# EAGLE board apc_v2 (EAGLE 5.07)
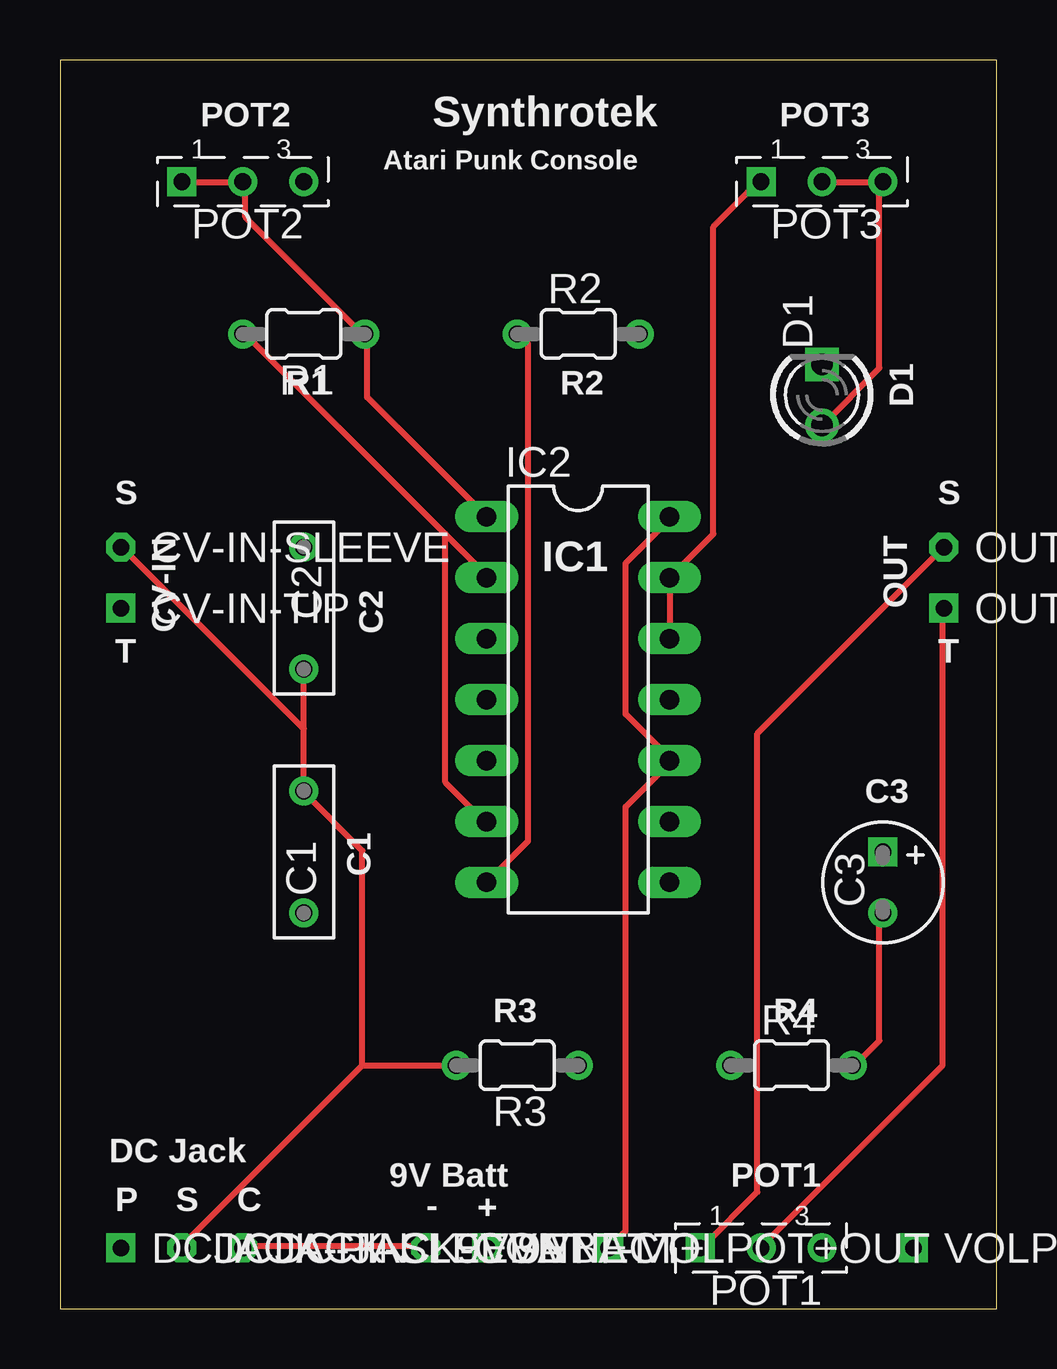
[diagram p0: board, top side]
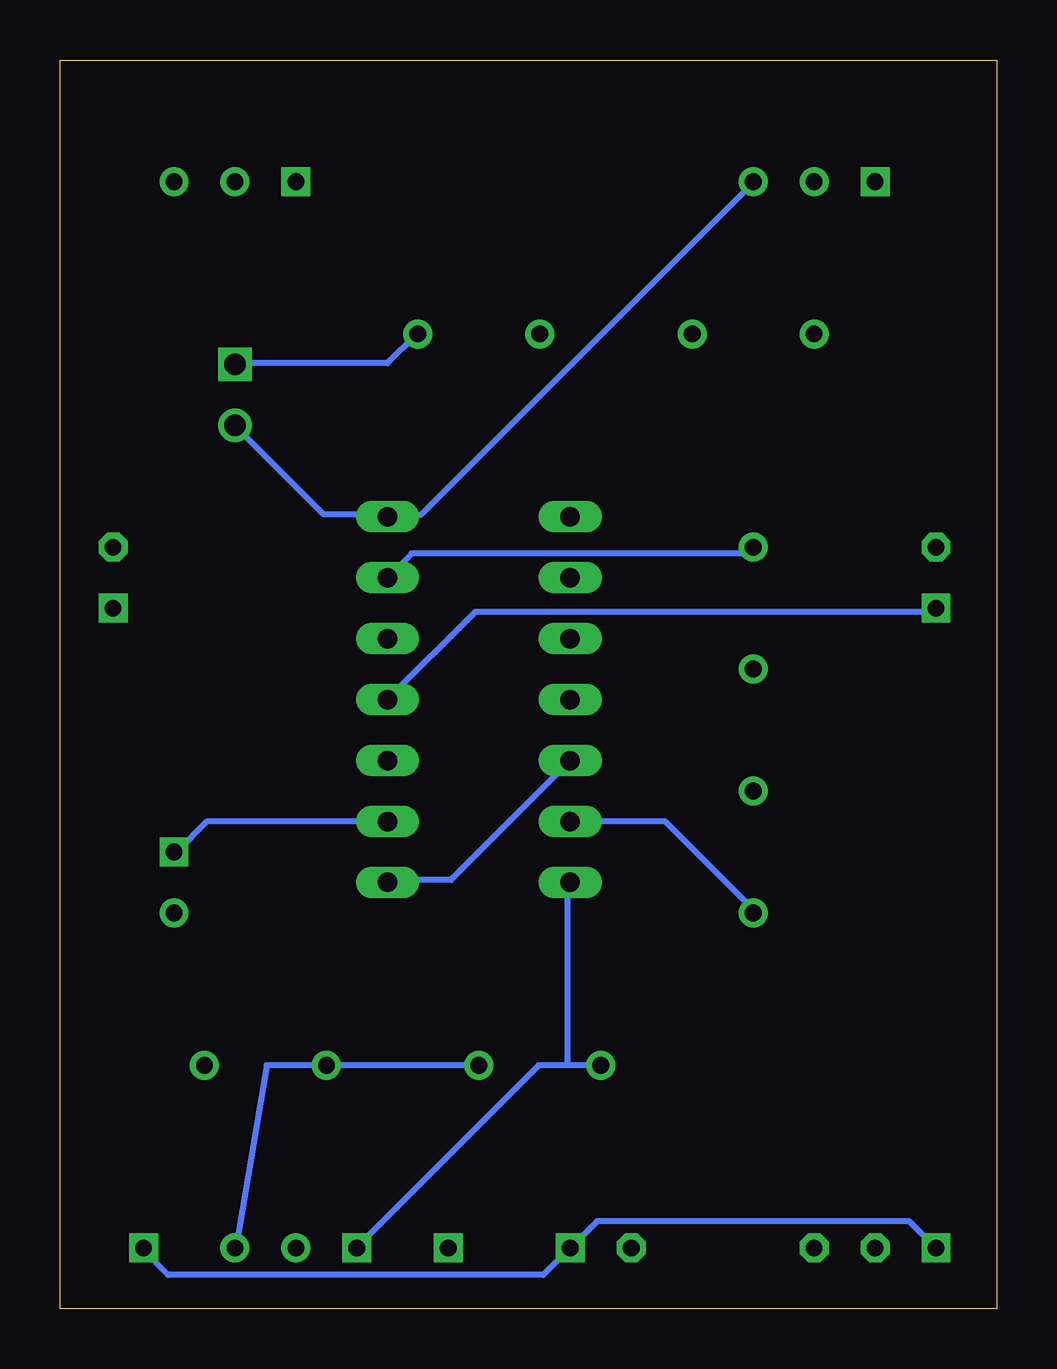
[diagram p1: board, bottom side, seen from below]

Size 39.04 x 52.06 mm. Coordinates in mm from the lower left corner, seen from the top.
Outline: 0,0 39.04,0 39.04,52.06 0,52.06 0,0
Copper layers (1*16): Top 0.035mm / dielectric 1.5mm / Bottom 0.035mm
Design rules "default": minimum track width 10mil, minimum drill 24mil, track to track 8mil, track to pad 8mil, pad to pad 8mil, via to via 8mil, smd to smd 8mil, copper to edge 40mil, drill to drill 8mil, minimum pad ring 10mil, minimum via ring 8mil, stop-mask expansion 4mil, vias tented up to drill 0mil, thermal gap 10mil

## Footprints (pad centres in the part's own frame; a part is rotated, then mirrored left to right if it is on the bottom)
SQUARE = drill 0.7 square: 1 0,0
OCTOGON = drill 0.7 octagon: 1 0,0
072X025 = drill 0.7 round: 1 -2.54,0; 2 2.54,0
050_020_1 = drill 0.7 square: + -1.27,0 | drill 0.7 round: - 1.27,0
LED3MM = drill 0.9 round: A -1.27,0 | drill 0.9 square: K 1.27,0
DIL14 = drill 0.813 long: 1 -7.62,-3.81; 2 -5.08,-3.81; 3 -2.54,-3.81; 4 0,-3.81; 5 2.54,-3.81; 6 5.08,-3.81; 7 7.62,-3.81; 8 7.62,3.81; 9 5.08,3.81; 10 2.54,3.81; 11 0,3.81; 12 -2.54,3.81; 13 -5.08,3.81; 14 -7.62,3.81
POT = drill 0.7 square: 1 2.54,0 | drill 0.7 round: 2 0,0; 3 -2.54,0
R0204/2 = drill 0.7 round: 1 -2.54,0; 2 2.54,0

## Placement (x,y rotation side)
9VBATT+  [SQUARE]  17.78,2.54 0 top
9VBATT-  [OCTOGON]  15.24,2.54 0 top
C1  0.01uF  [072X025]  10.16,19.05 90 top
C2  0.1uF  [072X025]  10.16,29.21 270 top
C3  10uF  [050_020_1]  34.29,17.78 270 top
CV-IN-SLEEVE  [OCTOGON]  2.54,31.75 0 top
CV-IN-TIP  [SQUARE]  2.54,29.21 0 top
D1  LED3MM  [LED3MM]  31.75,38.1 90 top
DC-JACK-CONNECT  [OCTOGON]  7.62,2.54 0 top
DCJACK-PIN  [SQUARE]  2.54,2.54 0 top
DCJACK-SLEEVE  [OCTOGON]  5.08,2.54 0 top
IC2  LM556N  [DIL14]  21.59,25.4 270 top
OUT-SLEEVE  [OCTOGON]  36.83,31.75 0 top
OUT-TIP  [SQUARE]  36.83,29.21 0 top
POT1  [POT]  29.21,2.54 180 top
POT2  500k  [POT]  7.62,46.99 180 top
POT3  500k  [POT]  31.75,46.99 180 top
R1  1k  [R0204/2]  10.16,40.64 180 top
R2  1k  [R0204/2]  21.59,40.64 0 top
R3  4.7k  [R0204/2]  19.05,10.16 180 top
R4  10k  [R0204/2]  30.48,10.16 0 top
VOLPOT+IN  SWITCH  [SQUARE]  35.56,2.54 0 top
VOLPOT+OUT  SWITCH  [SQUARE]  22.86,2.54 0 top

## Library data of the parts
9VBATT+ 9VBATT- CV-IN-SLEEVE CV-IN-TIP DC-JACK-CONNECT DCJACK-PIN DCJACK-SLEEVE OUT-SLEEVE OUT-TIP VOLPOT+IN VOLPOT+OUT = gm-supply
C1 C2 = gm-caps-film-box
C3 = gm-caps-electro-pol
D1 = gm-diodes
IC2 = linear
POT1-POT3 = gm-pots
R1-R4 = gm-resistors

## Nets
+9V: D1.A IC2.10 IC2.14 POT2.3 POT3.2 POT3.3 VOLPOT+OUT.1
C3: C3.+ IC2.9
GND: C1.2 C2.2 CV-IN-SLEEVE.1 DCJACK-SLEEVE.1 IC2.7 OUT-SLEEVE.1 POT1.1 R2.1 R3.2
N$1: D1.K R2.2
N$2: C1.1 IC2.2 IC2.6 R1.2
N$3: IC2.1 POT2.1 POT2.2 R1.1
N$5: IC2.5 IC2.8
N$6: C2.1 IC2.12 IC2.13 POT3.1
N$7: C3.- R4.2
N$8: POT1.3 R3.1 R4.1
N$9: CV-IN-TIP.1 IC2.11
N$10: OUT-TIP.1 POT1.2
N$11: 9VBATT+.1 DCJACK-PIN.1 VOLPOT+IN.1
N$12: 9VBATT-.1 DC-JACK-CONNECT.1

## Tracks (layer width: path | path; a pad name or v marks a point on that pad's centre or on a via)
+9V
  Top 0.254: VOLPOT+OUT.1 23.57,3.25 23.57,20.93 25.4,22.76 IC2.10 25.4,22.96 23.57,24.79 23.57,31.09 25.4,32.92 IC2.14 | 34.14,46.94 31.9,46.94 POT3.2 | 34.14,46.94 34.14,39.22 D1.A | 34.14,46.94 POT3.3
  Bottom 0.254: 25.4,33.12 23.98,33.12 10.16,46.94 POT2.3 | 25.4,33.12 28.04,33.12 D1.A | IC2.14 25.4,33.12
C3
  Bottom 0.254: IC2.9 32.92,20.32 34.14,19.1 C3.+
GND
  Top 0.254: 10.16,24.18 C1.2 10.16,21.54 12.6,19.1 12.6,10.16 | 10.16,24.18 C2.2 | 10.16,24.18 2.64,31.7 CV-IN-SLEEVE.1 | OUT-SLEEVE.1 29.06,23.98 29.06,4.88 26.82,2.64 POT1.1 | 12.6,10.16 5.08,2.64 DCJACK-SLEEVE.1 | 12.6,10.16 R3.2 | R2.1 19.1,40.64 19.51,40.23 19.51,19.51 IC2.7
  Bottom 0.254: 17.88,10.16 19.1,10.16 26.62,2.64 POT1.1 | R3.2 17.88,10.16 | 17.88,10.16 17.88,17.68 IC2.7
N$1
  Bottom 0.254: R2.2 24.18,40.64 25.4,39.42 31.7,39.42 D1.K
N$2
  Top 0.254: 16.05,32.31 17.68,30.68 17.68,30.48 IC2.2 | 16.05,32.31 7.72,40.64 R1.2 | 16.05,32.31 16.05,21.95 17.68,20.32 IC2.6
  Bottom 0.254: C1.1 10.16,16.66 13.82,20.32 IC2.6
N$3
  Top 0.254: POT2.1 5.08,46.94 7.52,46.94 POT2.2 7.72,46.94 7.72,45.52 12.6,40.64 R1.1 12.8,40.64 12.8,38 IC2.1
N$5
  Bottom 0.254: IC2.5 22.76,17.88 25.4,17.88 IC2.8
N$6
  Top 0.254: POT3.1 29.06,46.94 27.23,45.11 27.23,32.31 IC2.13 IC2.12
  Bottom 0.254: IC2.13 24.38,31.5 10.36,31.5 10.16,31.7 C2.1
N$7
  Top 0.254: R4.2 33.12,10.16 34.14,11.18 34.14,16.46 C3.-
N$8
  Bottom 0.254: R3.1 R4.1 30.43,10.16 31.7,2.64 POT1.3
N$9
  Bottom 0.254: IC2.11 21.74,29.06 2.64,29.06 CV-IN-TIP.1
N$10
  Top 0.254: POT1.2 29.26,2.64 36.78,10.16 36.78,29.06 OUT-TIP.1
N$11
  Bottom 0.254: DCJACK-PIN.1 3.66,3.66 16.66,3.66 9VBATT+.1 18.9,1.42 34.54,1.42 35.56,2.44 VOLPOT+IN.1
N$12
  Top 0.254: DC-JACK-CONNECT.1 7.72,2.64 15.24,2.64 9VBATT-.1

## Text on the board
tPlace: Synthrotek | POT2 | POT3 | Atari Punk Console | R1 | R2 | D1 | S | S | IC1 | C2 | OUT | CV-IN | T | T | C3 | C1 | R3 | R4 | DC Jack | 9V Batt | - | POT1 | P | S | C | +